# Altium PCB vxl_V2.PcbDoc
Units mil, origin at the board's own origin, x right, y up, seen from the top; angles counter-clockwise.
Board outline 3345 x 2685 mil, 2 copper layers (Top Layer, Bottom Layer); 25 components, 19 nets, 91 pads, 0 vias.
Unrouted connection lines stored in the file: 1.
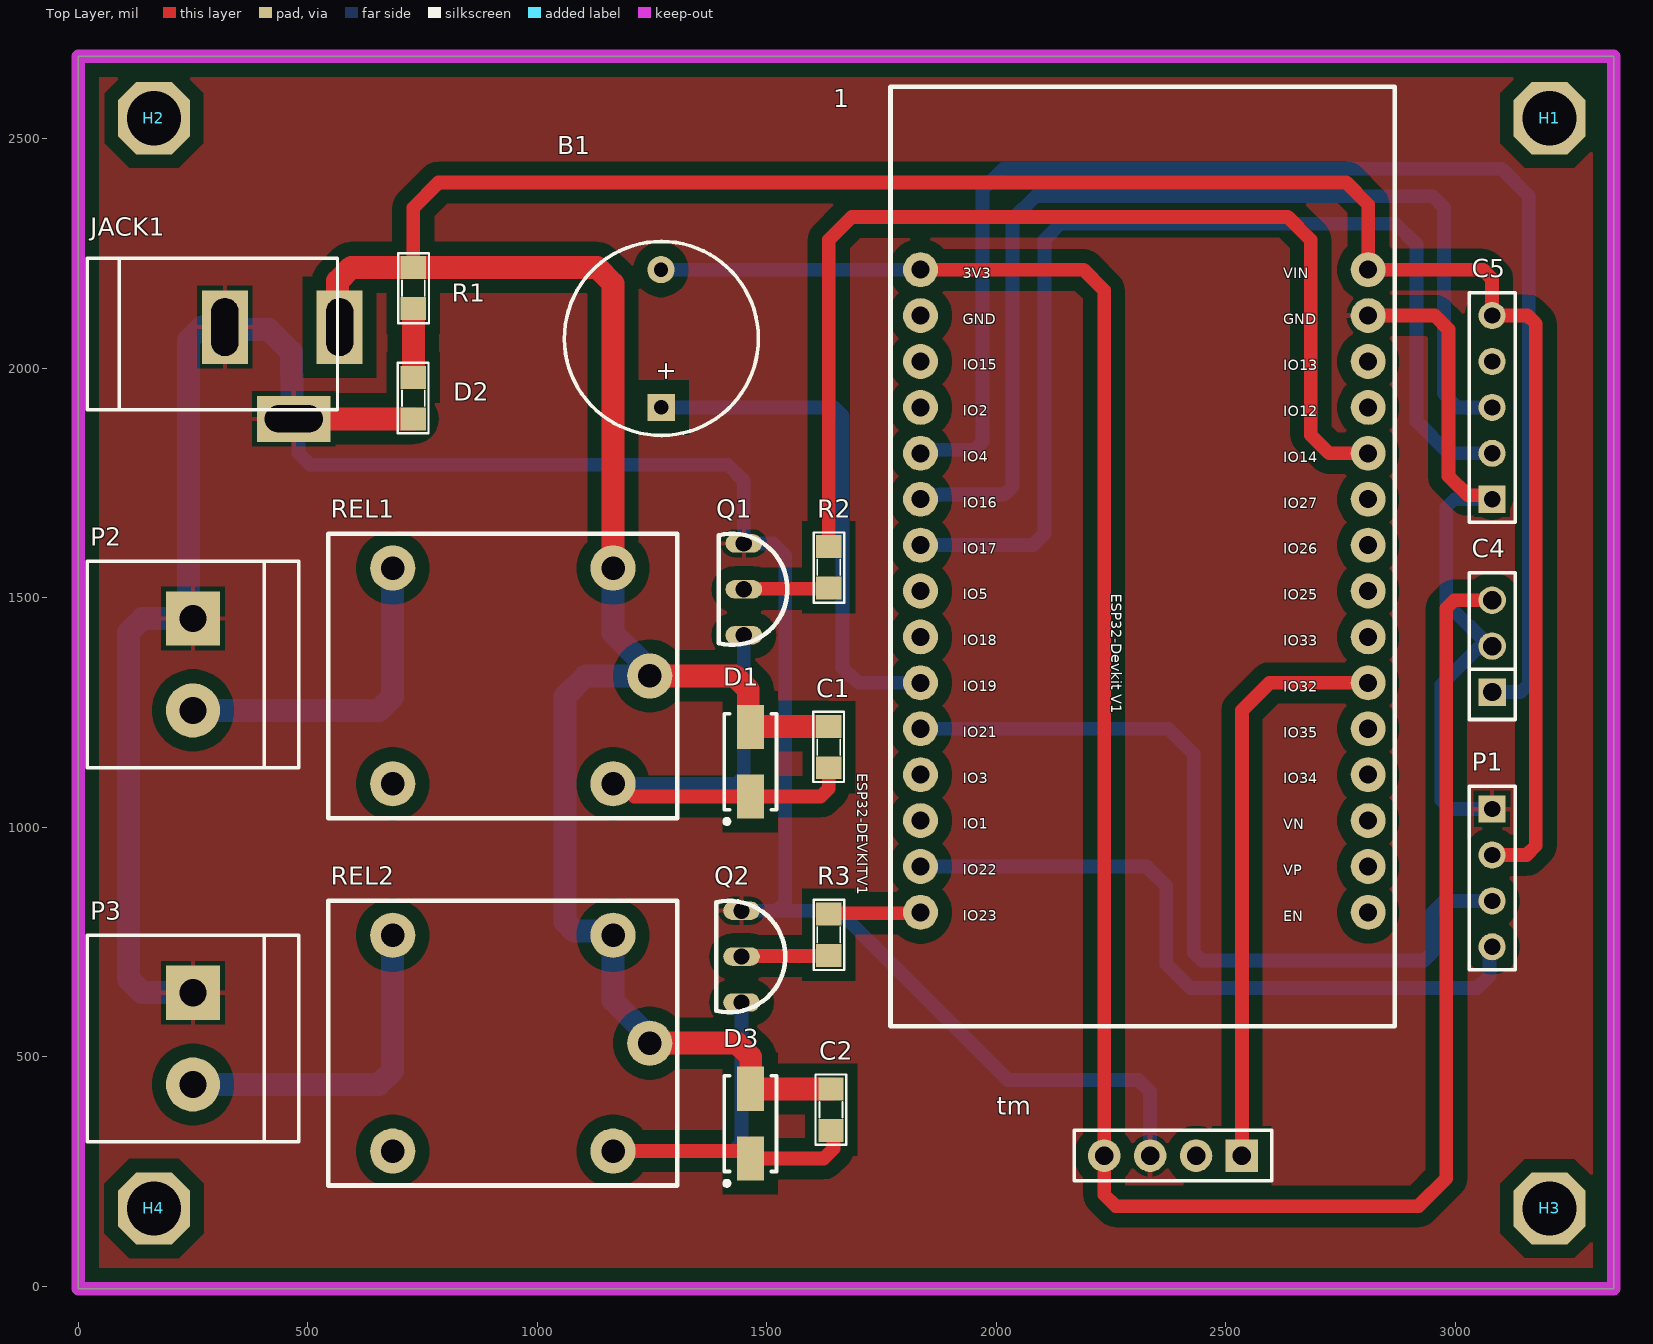
[diagram p0: Top Layer view]
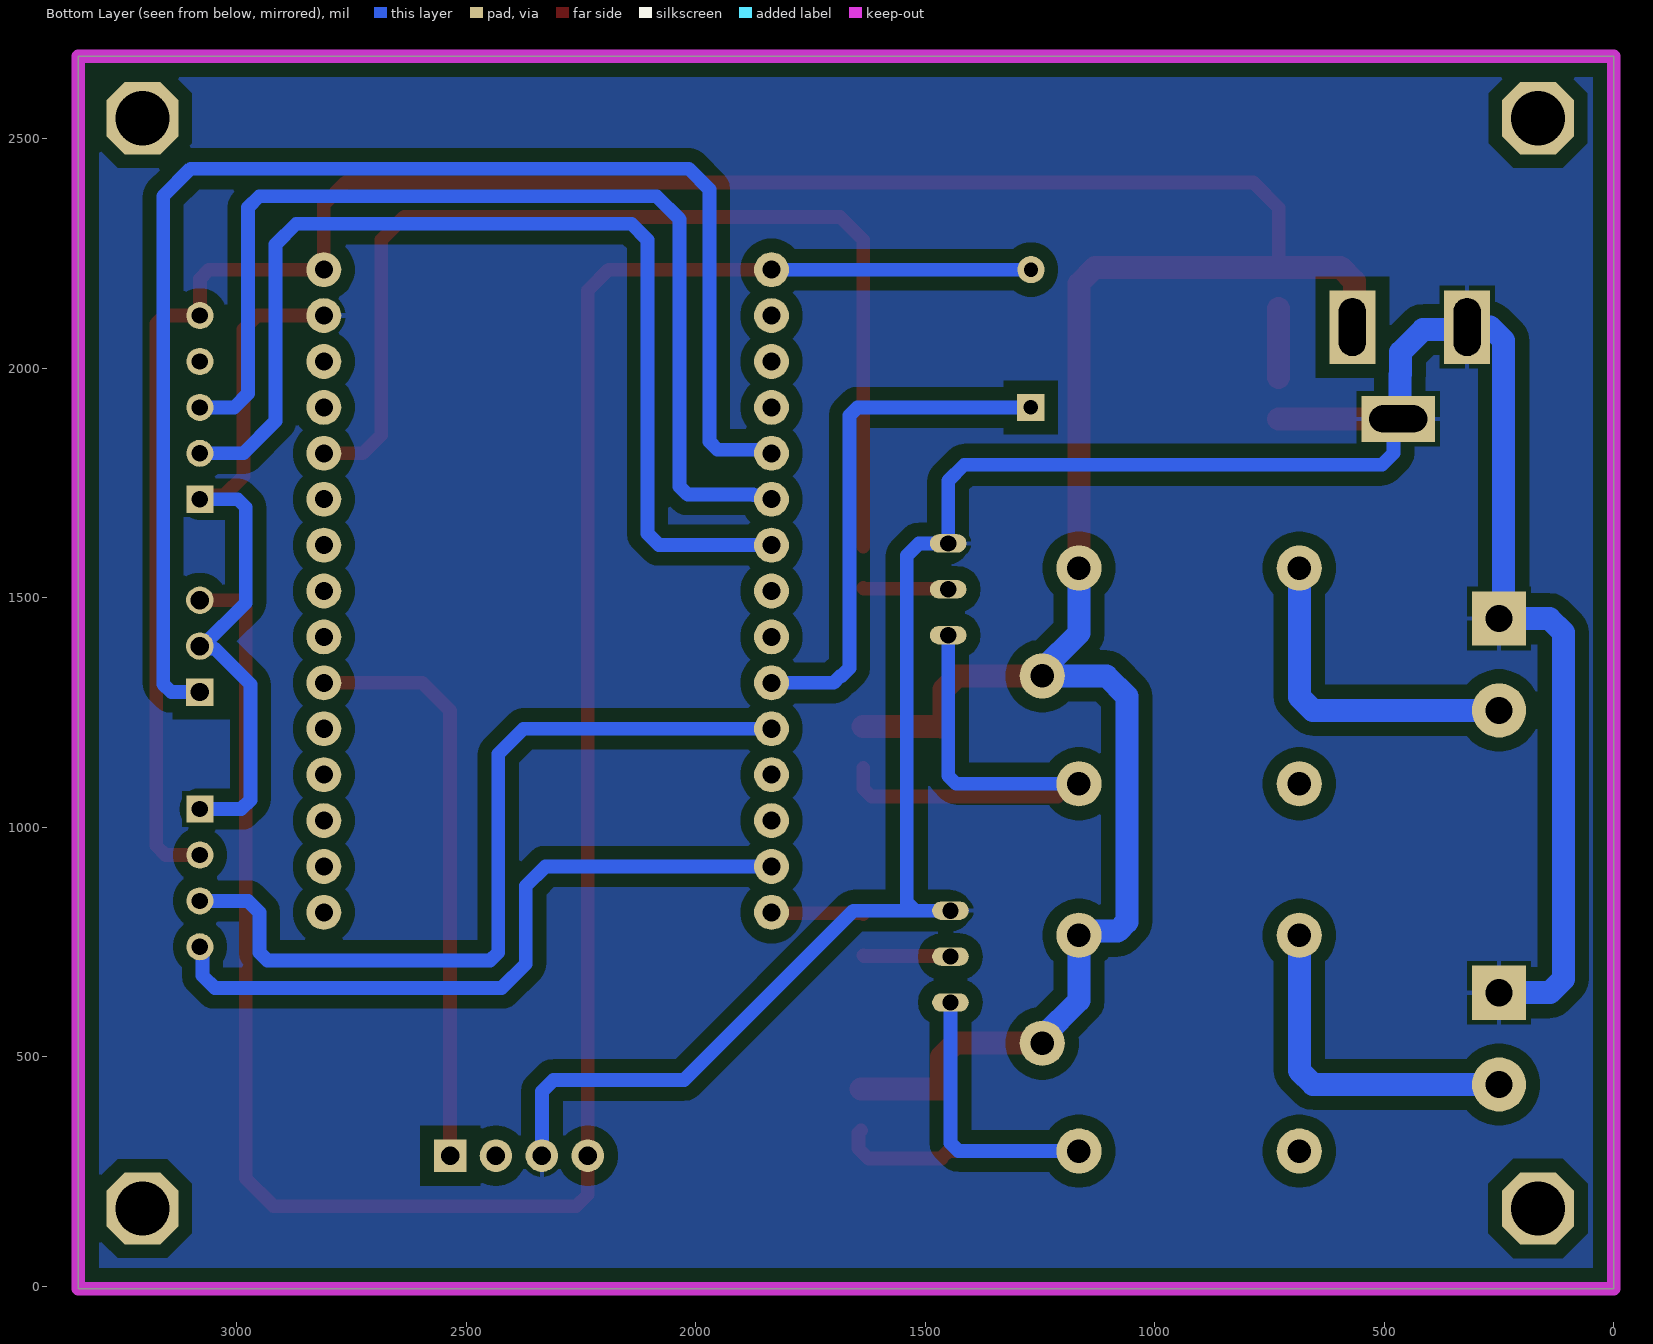
[diagram p1: Bottom Layer view, seen from below]
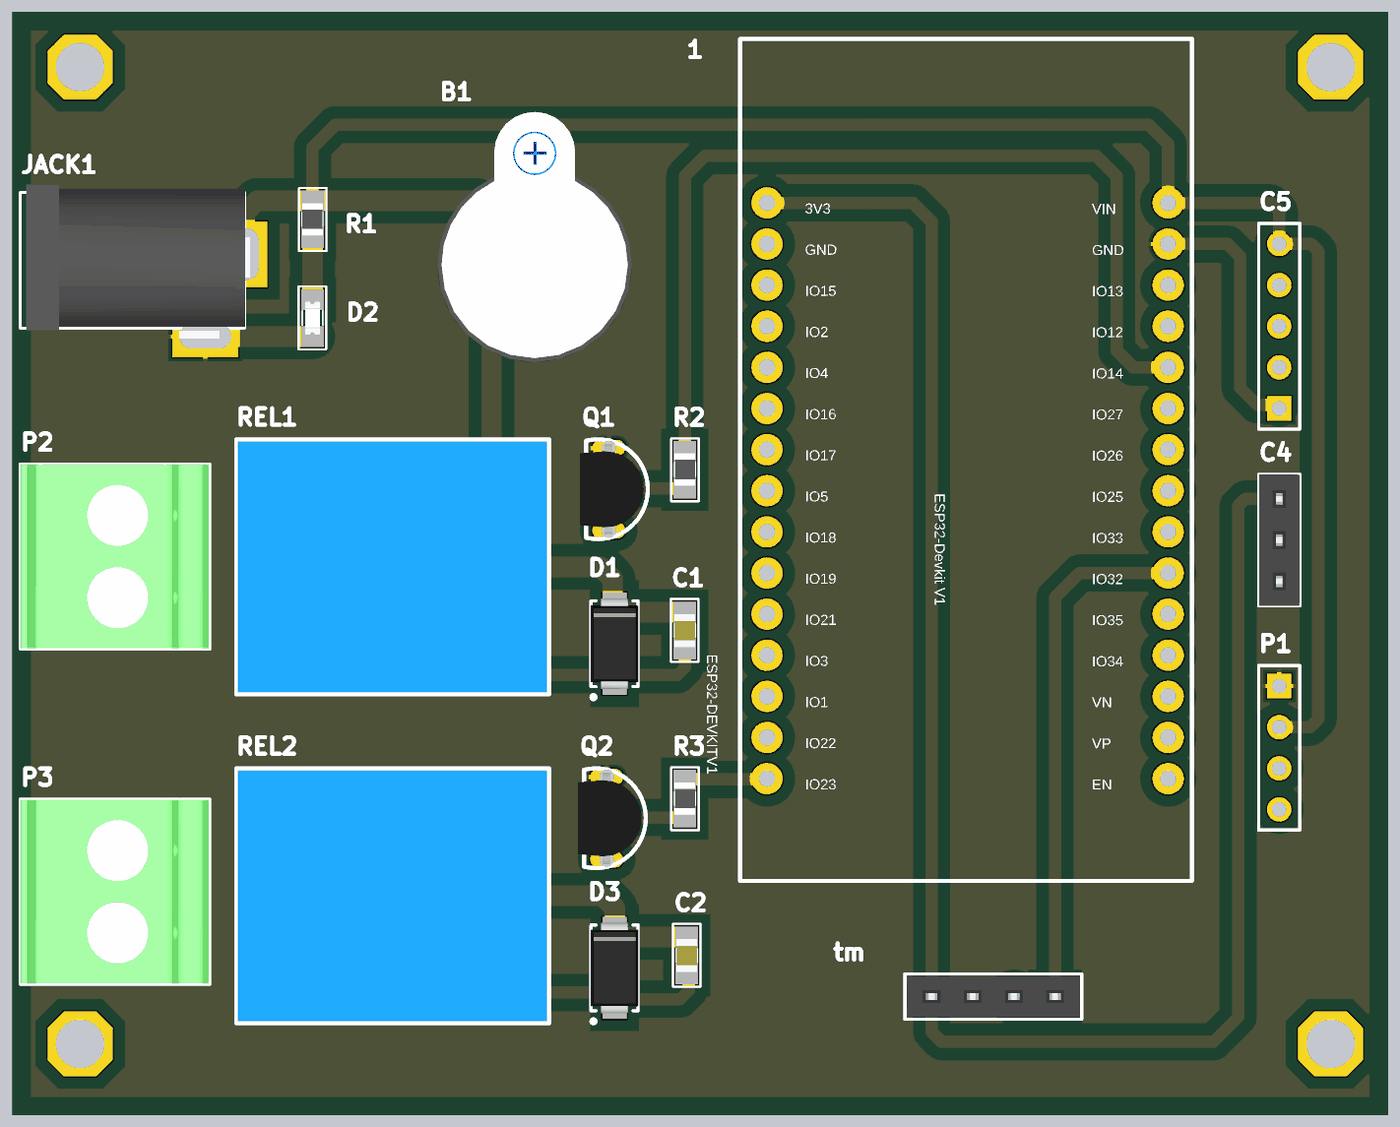
[diagram p2: 3D render of the assembled board from above, using the file's embedded part models]

## Layer stack, top to bottom
Top Solder: solder mask 0.4, Solder Resist, Dk 3.5
Top Layer: signal copper 1.4
Dielectric 1: dielectric 12.6, FR-4, Dk 4.8
Bottom Layer: signal copper 1.4
Bottom Solder: solder mask 0.4, Solder Resist, Dk 3.5

## Board outline
0,-5 0,2680 3345,2680 3345,-5

## Design rules (kind name [scope] priority, off if disabled: settings)
Clearance [All] p1: gap=30 ignorepadtopadclearanceinfootprint=FALSE
PolygonConnect [All] p1: connectstyle=Relief reliefconductorwidth=10 reliefentries=4 polygonreliefangle="90 Angle" airgapwidth=10
RoutingVias [All] p1: holewidth=28 width=50 viastyle="Through Hole" minholewidth=28 minwidth=50 maxholewidth=28 maxwidth=50
SolderMaskExpansion [All] p1: expansion=4 istentingtop=FALSE
Width [All] p1: maxlimit=50 minlimit=20 preferedwidth=30
30 further rules are at their usual default settings.

## Components (designator, comment, footprint, x,y, rotation, side; value= is the part's Value field where it differs from the comment)
1 "ESP32DEVKITV1" ESP32-DEVKITV1 2367.87,1314.61 r270 top
B1 "BUZZER" SPEAKER 1270,1915 r90 top
C1 "104" "0805 CAP" 1635,1175 r270 top
C2 "104" "0805 CAP" 1640,385 r270 top
C4 "Hồng ngoại" JP3-C1T 3080,1295 r90 top
C5 "Header5" HDR1X5 3080,1715 r90 top
D1 "DIODE" "DIODE SMA" 1464.08,1143.02 r90 top
D2 "LED" "LED SMD 0805" 732.58,1934.61 r270 top
D3 "DIODE" "DIODE SMA" 1464.08,354.76 r90 top
H1 "HOLE" HOLE 3205,2545 r0 top
H2 "HOLE" HOLE 165,2545 r0 top
H3 "HOLE" HOLE 3205,170 r0 top
H4 "HOLE" HOLE 165,170 r0 top
JACK1 "JACK DC" "JACK DC" 444.56,1990 r0 top value="Jac DC"
P1 "LCD I2C" HDR1X4 3080,1040 r270 top
P2 "DEVICE 1" "CON 2KF 5.08MM" 250,1455 r270 top
P3 "DEVICE 1" "CON 2KF 5.08MM" 250,640 r270 top
Q1 "N-MOSFET SOT23" "TO-92 - 2N7000" 1450,1518.72 r270 top
Q2 "N-MOSFET SOT23" "TO-92 - 2N7000" 1445,718.72 r270 top
R1 "1k" "0805 RESISTOR" 730,2175 r90 top value="R1/4W - 1K"
R2 "100k" "0805 RESISTOR" 1635,1566.5 r90 top value="R1/4W - 1K"
R3 "100k" "0805 RESISTOR" 1635,766.5 r90 top value="R1/4W - 1K"
REL1 "RELAY 5V 10A" "RELAY 5V-10A" 1245,1330 r90 top
REL2 "RELAY 5V 10A" "RELAY 5V-10A" 1245,530 r90 top
tm "MQ2-MOD" MQ2-MODULE 2385,285 r180 top (schematic designator C3)

## Footprints (in the part's own frame and the unit in brackets; to place one, negate y for a bottom-side part, rotate by r counter-clockwise, add the part's x,y. Pads: shape width x height; smd on the part's side, far side on the other; paste and mask are expansions set on the pad)
"0805 CAP" [mil] "Compoment SMD 80x50mil"
  rect 50x55 smd: 1(-45,0) 2(45,0)
  silkscreen extent -77,-34 76,33, body extent -40,-25 40,25, height 24
"0805 RESISTOR" [mil] "Compoment SMD 80x50mil"
  rect 50x55 smd: 1(-45,0) 2(45,0)
  silkscreen extent -77,-34 76,33, body extent -39,-25 39,25, height 24
"CON 2KF 5.08MM" [mm] "Connector; Header; 2 Position"
  rect 3x3 hole 1.5: 1(0,0)
  round 3 hole 1.5: 2(5.08,0)
  silkscreen extent -3.18,-5.84 8.26,5.84, body extent -3.13,-5.84 8.21,5.78, height 18
"DIODE SMA" [mm]
  rect 2.45x1.5 smd: 1(-1.925,0) 2(1.925,0)
  silkscreen extent -3.42,-1.45 2.65,1.45, body extent -2.8,-1.48 2.8,1.47, height 2.7
ESP32-DEVKITV1 [mil]
  round 76 hole 39.37: 1(-900.39,-533.07) 2(-800.39,-533.07) 3(-700.39,-533.07) 4(-600.39,-533.07) 5(-500.39,-533.07) 6(-400.39,-533.07) 7(-300.39,-533.07) 8(-200.39,-533.07) 9(-100.39,-533.07) 10(-0.39,-533.07) 11(99.61,-533.07) 12(199.61,-533.07) 13(299.61,-533.07) 14(399.61,-533.07) 15(499.61,-533.07) 16(499.61,442.13) 17(399.61,442.13) 18(299.61,442.13) 19(199.61,442.13) 20(99.61,442.13) 21(-0.39,442.13) 22(-100.39,442.13) 23(-200.39,442.13) 24(-300.39,442.13) 25(-400.39,442.13) 26(-500.39,442.13) 27(-600.39,442.13) 28(-700.39,442.13) 29(-800.39,442.13) 30(-900.39,442.13)
  silkscreen extent -1299,-598 748,500
HDR1X4 [mm] "Connector; Header; 4 Position"
  rect 1.5x1.5 hole 0.9: 1(0,0)
  round 1.5 hole 0.9: 2(2.54,0) 3(5.08,0) 4(7.62,0)
  silkscreen extent -1.27,-1.27 8.89,1.27, body extent -1.27,-1.27 8.89,1.27, height 7
HDR1X5 [mm] "Connector; Header; 5 Position"
  rect 1.5x1.5 hole 0.9: 1(0,0)
  round 1.5 hole 0.9: 2(2.54,0) 3(5.08,0) 4(7.62,0) 5(10.16,0)
  silkscreen extent -1.27,-1.27 11.43,1.27, body extent -1.27,-1.27 11.43,1.27, height 7
HOLE [mm]
  oct 4x4 hole 3: H(0,0)
"JACK DC" [mil] "Jac DC input"
  rect 100x160 hole 59.06 slot 125.98 at 90 deg: 1(125,100) 2(-125,100)
  rect 160x100 hole 59.06 slot 125.98 at 0 deg: 3(25,-100)
  silkscreen extent -425,-80 120,250, body extent -410,-105 134,269, height 434
JP3-C1T [mm] "3 row, straight, gold plating"
  rect 1.52x1.52 hole 1.02: 1(0,0)
  round 1.52 hole 1.02: 2(2.54,0) 3(5.08,0)
  silkscreen extent -1.52,-1.27 6.6,1.27, body extent -1.52,-1.25 6.6,1.25, height 8.51
"LED SMD 0805" [mil] "Compoment SMD 80x50mil"
  rect 50x55 smd: 1(-45.39,-2.58) 2(44.61,-2.58)
  silkscreen extent -77,-37 76,30, body extent -41,-21 41,15, height 33
MQ2-MODULE [mm]
  rect 1.8x1.8 hole 1.02: 1(-3.81,0)
  round 1.8 hole 1.02: 2(-1.27,0) 3(1.27,0) 4(3.81,0)
  silkscreen extent -5.46,-1.4 5.46,1.4, body extent -10,-1.25 10,21.46, height 38
"RELAY 5V-10A" [mm]
  round 2.5 hole 1.3: 1(0,0) 2(-5.969,14.224) 3(5.969,14.224) 4(-5.969,2.032) 5(5.969,2.032)
  silkscreen extent -7.87,-1.52 7.87,17.78, body extent -7.75,-1.4 7.75,17.7, height 15.3
SPEAKER [mm]
  rect 1.5x1.5 hole 0.8: 1(0,0)
  round 1.5 hole 0.8: 2(7.62,0.013)
  silkscreen extent -1.55,-5.38 9.18,5.36, body extent -2.22,-6 13.24,6, height 4.5
"TO-92 - 2N7000" [mil] "TO, Flat Index; 3 In-Line, Axial Leads; Body Dia. 4.8mm"
  oval 40x80 hole 35.43: 1(0,0) 2(-100,0) 3(100,0)
  silkscreen extent -121,-55 121,95, body extent -110,-70 110,85, height 402

## Part data
C1 C2: library part "CAP CERAMIC", LatestRevisionDate=17-Jul-2002, LatestRevisionNote="Re-released for DXP Platform.", PackageReference=RAD-0.3, Published=8-Jun-2000, Publisher="Altium Limited"
C4: library part Header3, "Header IDC, 3 x 1 Pin Vertical 2.54mm Pitch (Non-Boxed, Male)", Manufacturer="W¨¹rth Elektronik eiSos GmbH", partNo=613002143121, ComponentLink1 Description=Manufacturer, ComponentLink1URL=http://www.we-online.com, ComponentLink2 Description=Datasheet, ComponentLink2URL=http://katalog.we-online.de/em/datasheet/6130xx143121.pdf, Created by="Karrer Zheng", Created Date="29 March 2013", NoPins=02
C5: "Header IDC, 5 x 1 Pin Vertical 2.54mm Pitch (Non-Boxed, Male)", Manufacturer="W¨¹rth Elektronik eiSos GmbH", partNo=613002143121, ComponentLink1 Description=Manufacturer, ComponentLink1URL=http://www.we-online.com, ComponentLink2 Description=Datasheet, ComponentLink2URL=http://katalog.we-online.de/em/datasheet/6130xx143121.pdf, Created by="Karrer Zheng", Created Date="29 March 2013", NoPins=02
P1: library part "Header 4H", LatestRevisionDate=17-Jul-2002, LatestRevisionNote="Re-released for DXP Platform.", Publisher="Altium Limited"
P2 P3: library part "Header 2H", LatestRevisionDate=17-Jul-2002, LatestRevisionNote="Re-released for DXP Platform.", Publisher="Altium Limited"
R1 R2 R3: library part RESISTOR
tm: Manufacturer="W¨¹rth Elektronik eiSos GmbH", partNo=613004143121, ComponentLink1 Description=Manufacturer, ComponentLink1URL=http://www.we-online.com, ComponentLink2 Description=Datasheet, ComponentLink2URL=http://katalog.we-online.de/em/datasheet/6130xx143121.pdf, Created by="Karrer Zheng", Created Date="29 March 2013", NoPins=04

## Nets (pads, with @x,y where several pads share a name; then routed paths per layer and width w, separated by ;. In a path a pad name is that pad's centre, name@x,y a point inside that pad or via, vN(x,y) a via of type N, cw(c..) or ccw(c..) an arc to the next point about the centre after c; other vN are vias at no path point)
3.3V: 1.1 B1.2 C4.3 tm.4 | length 5084.1
  Top Layer w30: 1.1 2190,2215 2235,2170 tm.4 2235,200 2260,175 2920,175 2980,235 2980,1477.43 2997.57,1495 C4.3
  Bottom Layer w30: B1.2 1.1
A0: 1.21 tm.1 | length 1269.9
  Top Layer w30: tm.1 2535,1255 2595,1315 1.21
Buzz: 1.10 B1.1 | length 1135.4
  Bottom Layer w30: B1.1 1647.43,1915 1665,1897.43 1665,1347.57 1682.57,1330 1685,1330 1700,1315 1.10
D0: 1.5 C4.1 | length 3078.5
  Bottom Layer w30: 1.5 1842.6,1822.8 1952.43,1822.8 1970,1840.37 1970,2390 2015,2435 3100,2435 3160,2375 3160,1312.57 3142.43,1295 C4.1
DV1: 1.26 R2.2 | length 2326.5
  Top Layer w30: R2.2 1635,2280 1685,2330 2635,2330 2685,2280 2685,1855 2725,1815 1.26
DV2: 1.15 R3.2 | length 201.2
  Top Layer w30: R3.2 1636.75,813.25 1833.05,813.25 1.15
GND: 1.29 C4.2 C5.1 D2.2 JACK1.2 JACK1.3 P1.1 P2.1 P3.1 Q1.2 Q2.2 tm.3 | length 7215.2
  Top Layer w30: 1.29 2955,2115 2985,2085 2985,1765 3026.15,1723.85 3071.15,1723.85 C5.1
  Top Layer w50: JACK1.3 D2.2
  Bottom Layer w30: JACK1.3 480,1879.56 480,1815 505,1790 1415,1790 1450,1755 Q1.2 1513.71,1618.72 1540,1592.43 1540,836.29 1522.43,818.72 ; Q2.2 1522.43,818.72 ; tm.3 2335,425 2310,450 2025,450 1656.28,818.72 1522.43,818.72 ; P1.1 2990,1040 2970,1060 2970,1312 3047.29,1389.29 3074.29,1389.29 C4.2 3074.05,1395 2980,1489.05 2980,1697.43 2997.57,1715 C5.1
  Bottom Layer w50: P3.1 139.29,640 110,669.29 110,1425 140,1455 P2.1 240,1465 240,2060.71 269.29,2090 JACK1.2 324.84,2084.73 415.27,2084.73 464.56,2035.44 464.56,1987.22 466.07,1985.71 466.07,1893.49 JACK1.3
NetC1_2: C1.2 D1.1 Q1.3 REL1.4 | length 1132.4
  Top Layer w30: REL1.4 1183.52,1095 1211.29,1067.23 D1.1 1617.43,1067.23 1635,1084.8 C1.2
  Bottom Layer w30: REL1.4 1432.43,1095 1450,1112.57 Q1.3
NetC2_2: C2.2 D3.1 Q2.3 REL2.4 | length 1131.7
  Top Layer w30: REL2.4 1449.55,295 1464.08,280.47 D3.1 1623.98,278.98 1645,300 1645,335 C2.2
  Bottom Layer w30: REL2.4 1427.43,295 1445,312.57 Q2.3
NetD2_1: D2.1 R1.1 | length 150
  Top Layer w50: D2.1 R1.1
NetP2_2: P2.2 REL1.3 | length 727.8
  Bottom Layer w50: P2.2 655.71,1255 685,1284.29 REL1.3
NetP3_2: P3.2 REL2.3 | length 742.4
  Bottom Layer w50: P3.2 655,440 685,470 REL2.3
NetQ1_1: Q1.1 R2.1 | length 186.2
  Top Layer w30: Q1.1 1451.39,1520.11 1633.61,1520.11 R2.1
NetQ2_1: Q2.1 R3.1 | length 191.2
  Top Layer w30: Q2.1 1446.39,720.11 1633.61,720.11 R3.1
RX: 1.6 C5.3 | length 2287.9
  Bottom Layer w30: 1.6 1843.6,1723.8 1874.18,1723.8 1875.37,1725 2017.43,1725 2035,1742.57 2035,2325 2085,2375 2950.68,2375 2975,2350.68 2975,1945 3005,1915 C5.3
SCL_LCD: 1.14 P1.4 | length 1525.3
  Bottom Layer w30: 1.14 2327.43,915 2370,872.43 2370,702.72 2422.72,650 3047.43,650 3074.44,677.01 3074.44,734.44 P1.4
SDA_LCD: 1.11 P1.3 | length 1812.7
  Bottom Layer w30: 1.11 2375,1215 2430,1160 2430,727.57 2447.57,710 2932.43,710 2950,727.57 2950,815 2975,840 P1.3
TX: 1.7 C5.2 | length 2342.8
  Bottom Layer w30: 1.7 2080,1615 2105,1640 2105,2280 2140,2315 2870.15,2315 2915,2270.15 2915,1885 2985,1815 C5.2
VCC: 1.30 C1.1 C2.1 C5.5 D1.2 D3.2 JACK1.1 P1.2 R1.2 REL1.1 REL1.5 REL2.1 REL2.5 | length 7755.2
  Top Layer w30: R1.2 730,2350 785,2405 2762.43,2405 2810,2357.43 1.30 3060,2215 3080,2195 C5.5 3157.43,2115 3175,2097.43 3175,960 3155,940 P1.2
  Top Layer w50: JACK1.1 565,2094.56 565,2190 595,2220 R1.2 1130,2220 1165,2185 REL1.5 ; REL2.1 1435,530 1465,500 1465,439.63 1460,434.63 D3.2 1464.63,430 C2.1 ; REL1.1 1430,1330 1459.55,1300.45 1459.55,1223.33 D1.2 1465.28,1220 C1.1
  Bottom Layer w50: REL1.5 1165,1423.1 1245,1343.1 REL1.1 1105,1330 1060.79,1285.79 1060.79,794.29 1080.81,774.27 1155.73,774.27 REL2.5 1165,623.1 1245,543.1 REL2.1
pads on no net: 1.2 1.3 1.4 1.8 1.9 1.12 1.13 1.16 1.17 1.18 1.19 1.20 1.22 1.23 1.24 1.25 1.27 1.28 C5.4 H1.H H2.H H3.H H4.H REL1.2 REL2.2 tm.2

## Polygon pours and split planes (outlines as drawn)
GND on Top Layer "GND_L01_P000" (solid, pour order 0): 5,5 3335,5 3335,2675 -5,2675 -5,10
GND on Bottom Layer "GND_L02_P001" (solid, pour order 1): 5,0 3335,0 3335,2680 -10,2680 -10,-5

## Keep-outs
Keep-Out Layer:
  the board outline again, w30

## Text inside footprints (layer, text, board x,y; h text height)
1: Top Overlay "ESP32-DEVKITV1" at 1689.13,1117.76 h40 r270; Top Overlay "ESP32-Devkit V1" at 2242.67,1508.7 h40 r270; Top Overlay "EN" at 2624.56,788.23 h40; Top Overlay "VP" at 2624.56,888.23 h40; Top Overlay "VN" at 2624.56,988.23 h40; Top Overlay "IO34" at 2624.56,1088.23 h40; Top Overlay "IO35" at 2624.56,1188.23 h40; Top Overlay "IO32" at 2624.56,1288.23 h40; Top Overlay "IO33" at 2624.56,1388.23 h40; Top Overlay "IO25" at 2624.56,1488.23 h40; Top Overlay "IO26" at 2624.56,1588.23 h40; Top Overlay "IO27" at 2624.56,1688.23 h40; Top Overlay "IO14" at 2624.56,1788.23 h40; Top Overlay "IO12" at 2624.56,1888.23 h40; Top Overlay "IO13" at 2624.56,1988.23 h40; Top Overlay "GND" at 2624.56,2088.23 h40; Top Overlay "VIN" at 2624.56,2188.23 h40; Top Overlay "IO23" at 1926.93,789.02 h40; Top Overlay "IO22" at 1926.93,889.02 h40; Top Overlay "IO1" at 1926.93,989.02 h40; Top Overlay "IO3" at 1926.93,1089.02 h40; Top Overlay "IO21" at 1926.93,1189.02 h40; Top Overlay "IO19" at 1926.93,1289.02 h40; Top Overlay "IO18" at 1926.93,1389.02 h40; Top Overlay "IO5" at 1926.93,1489.02 h40; Top Overlay "IO17" at 1926.93,1589.02 h40; Top Overlay "IO16" at 1926.93,1689.02 h40; Top Overlay "IO4" at 1926.93,1789.02 h40; Top Overlay "IO2" at 1926.93,1889.02 h40; Top Overlay "IO15" at 1926.93,1989.02 h40; Top Overlay "GND" at 1926.93,2089.02 h40; Top Overlay "3V3" at 1926.93,2189.02 h40
B1: Top Overlay "+" at 1298,1970.5 h40 r90